# Altium PCB TB Motor driver pcb.PcbDoc
Units mm, origin at the board's own origin, x right, y up, seen from the top; angles counter-clockwise.
Board outline 108 x 90 mm, 2 copper layers (Top Layer, Bottom Layer); 29 components, 23 nets, 106 pads, 141 vias.
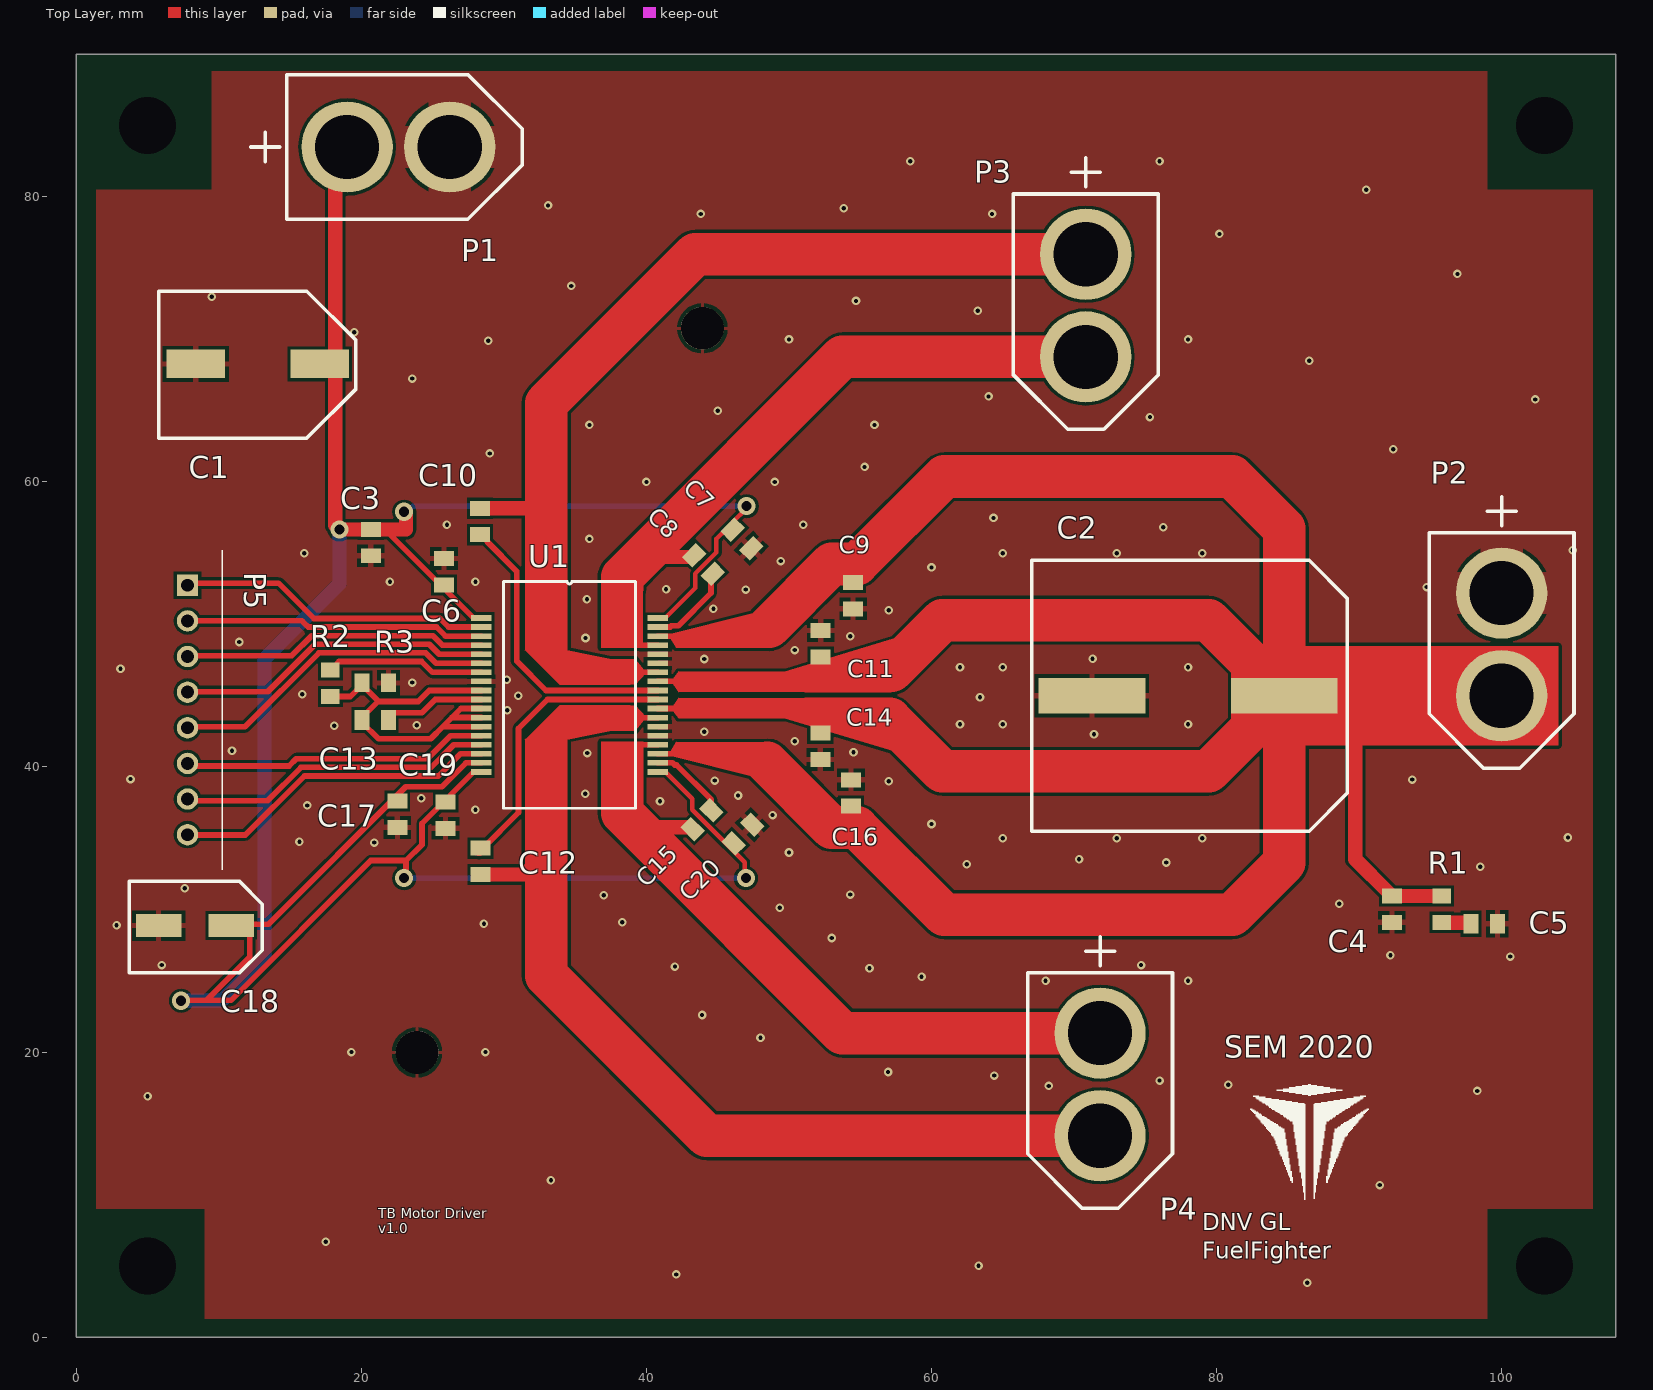
[diagram p0: Top Layer view]
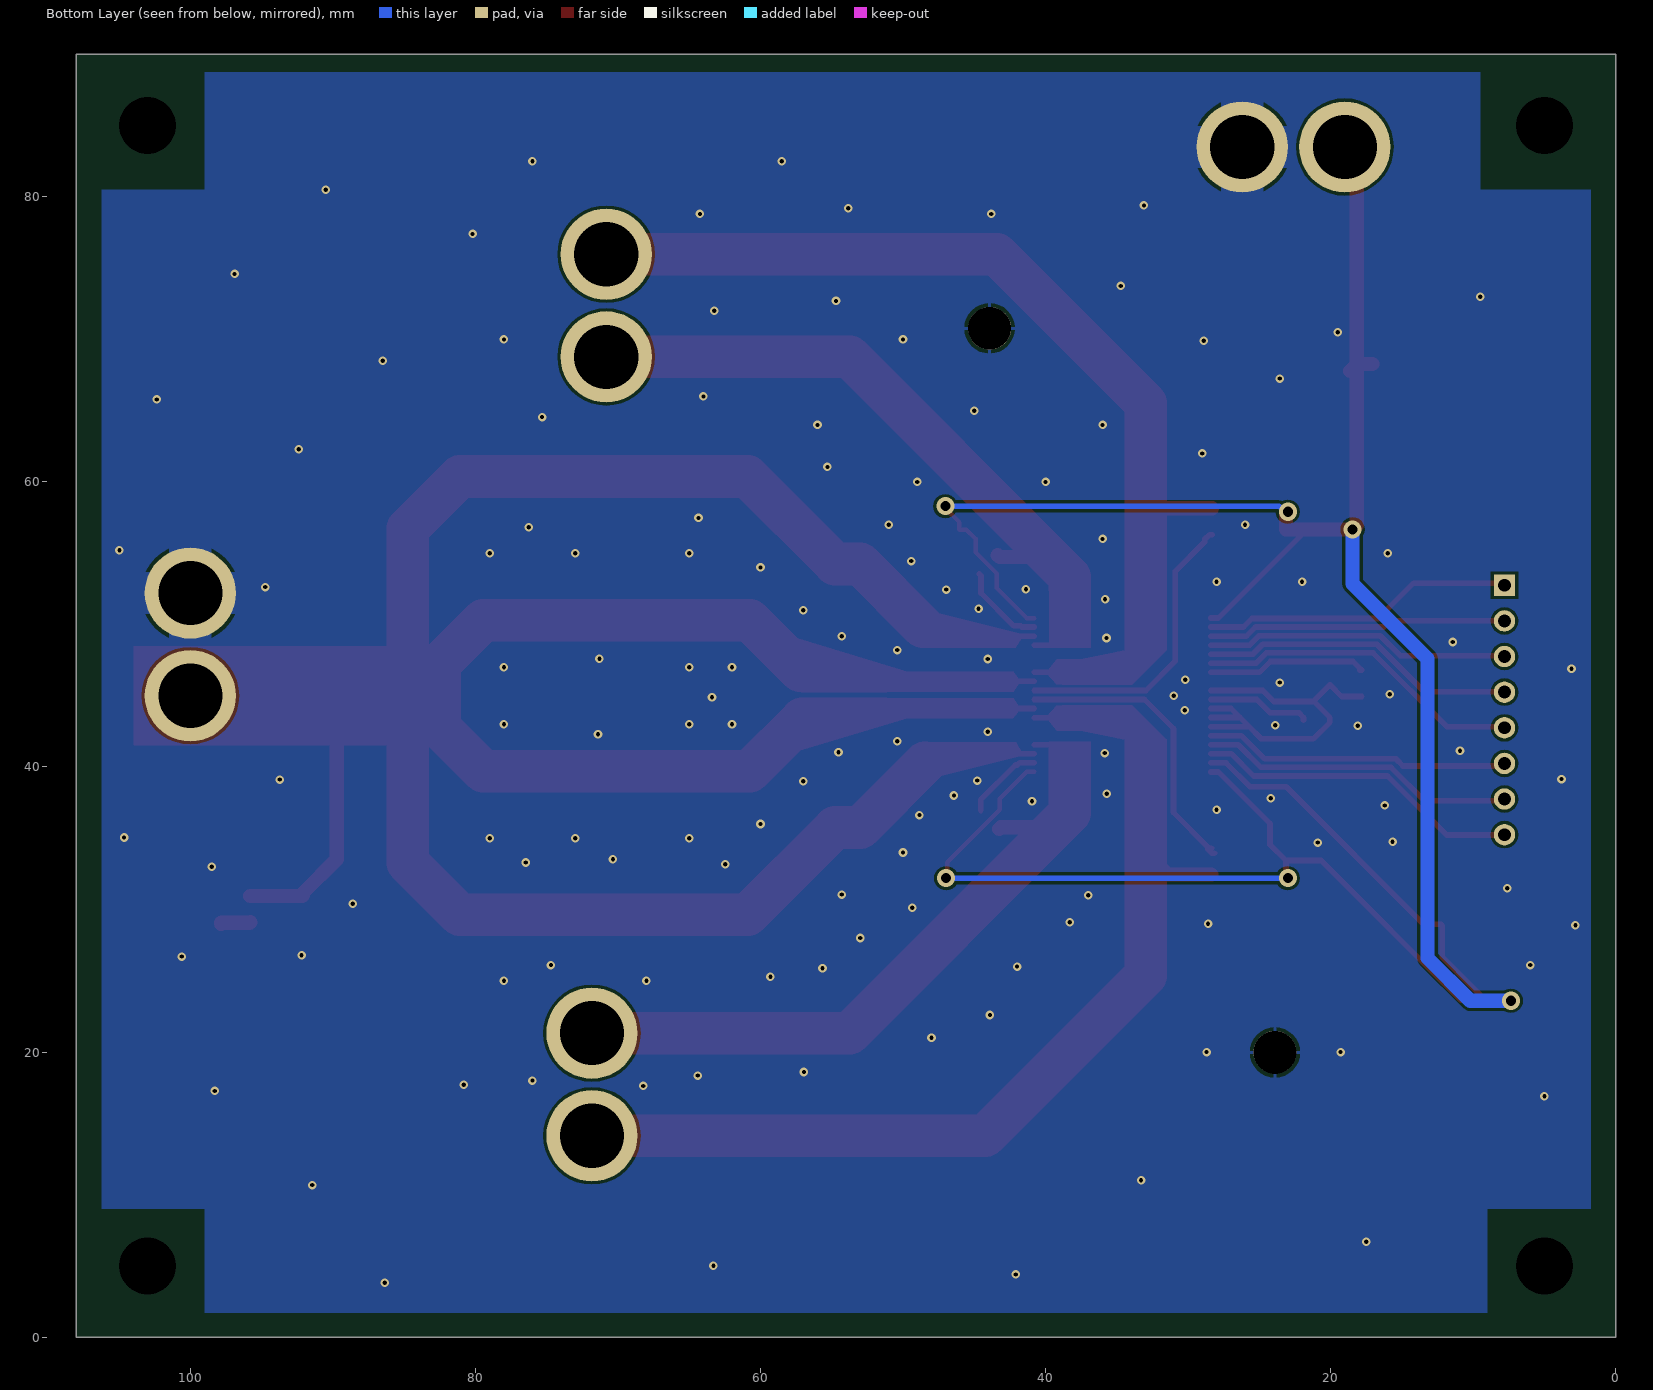
[diagram p1: Bottom Layer view, seen from below]
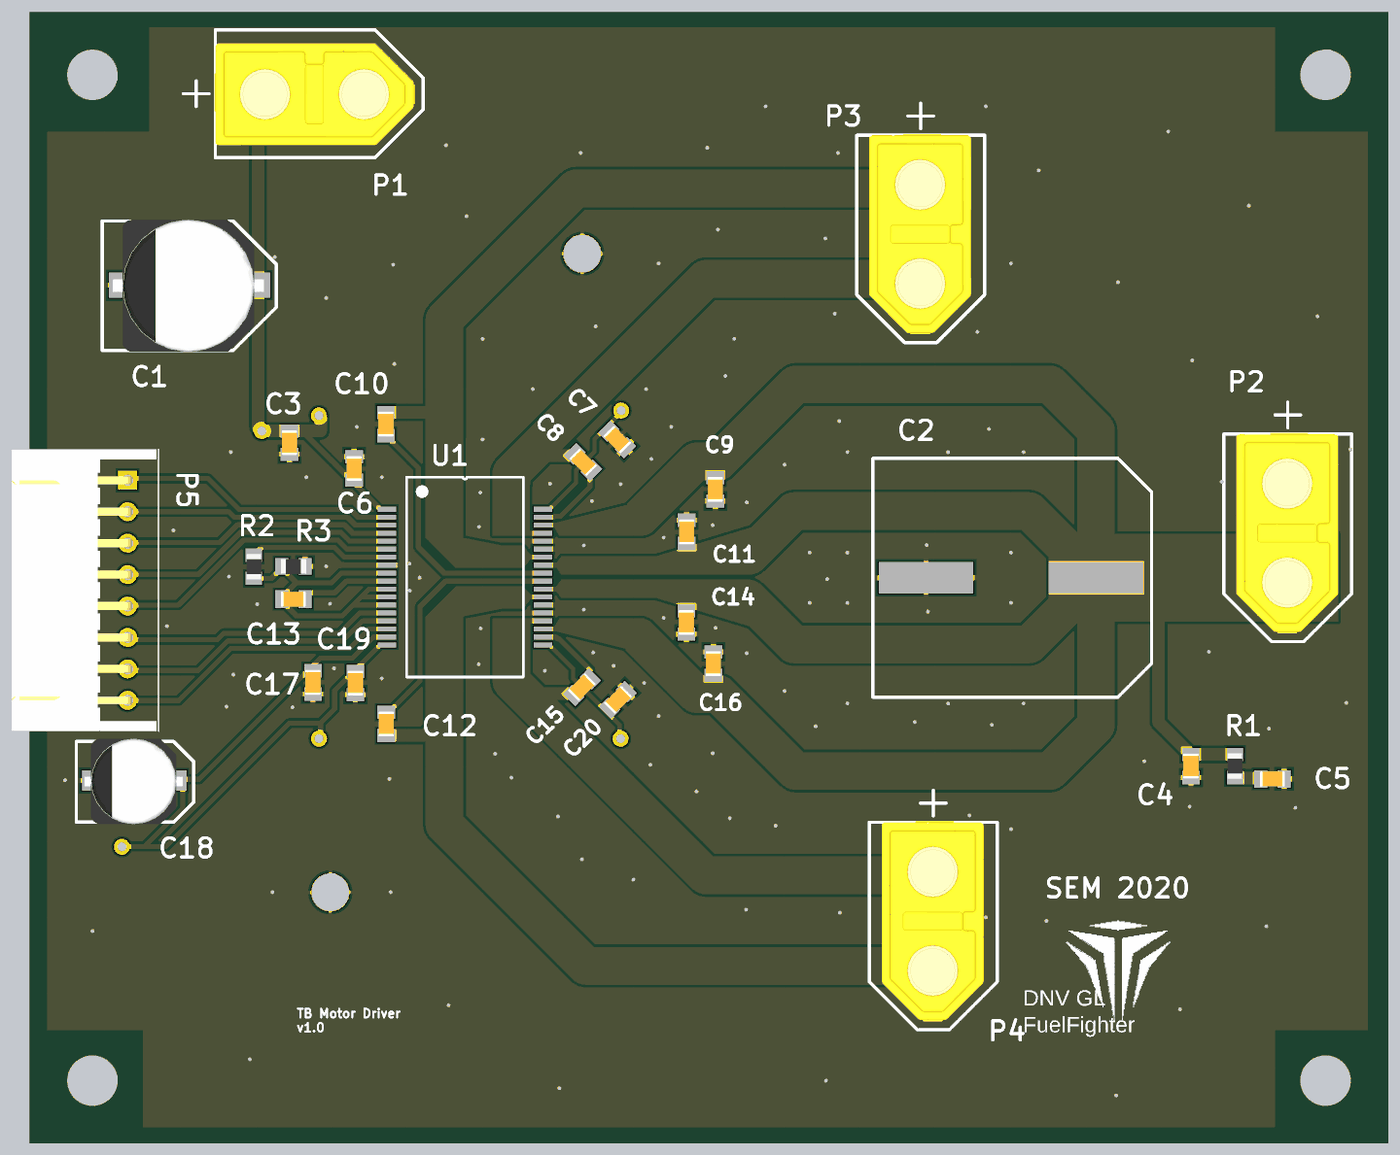
[diagram p2: 3D render of the assembled board from above, using the file's embedded part models]

## Layer stack, top to bottom
Top Solder: solder mask 0.0102, Solder Resist, Dk 3.5
Top Layer: signal copper 0.0356
Dielectric 1: dielectric 0.32, FR-4, Dk 4.8
Bottom Layer: signal copper 0.0356
Bottom Solder: solder mask 0.0102, Solder Resist, Dk 3.5

## Board outline
0,90 108,90 108,0 0,0

## Design rules (kind name [scope] priority, off if disabled: settings)
Clearance [All] p1: gap=0.203 ignorepadtopadclearanceinfootprint=TRUE
HoleSize [All] p1: absolutevalues=TRUE maxlimit=5 minlimit=0.025 maxpercent=80.000 minpercent=20.000
PlaneConnect [All] p1: planeconnectstyle=Relief reliefexpansion=0.508 reliefentries=4 reliefconductorwidth=0.4 reliefairgap=0.254
PolygonConnect [HasFootprint('XT-60')] p1: connectstyle=Relief reliefconductorwidth=3 reliefentries=4 polygonreliefangle="90 Angle" airgapwidth=0.254
PolygonConnect PolygonConnect_1 [All] p2: thpad.connectstyle=Relief thpad.reliefconductorwidth=0.254 thpad.reliefentries=4 thpad.polygonreliefangle="90 Angle" thpad.airgapwidth=0.254 smdpad.connectstyle=Relief smdpad.reliefconductorwidth=0.4 smdpad.reliefentries=4 smdpad.polygonreliefangle="90 Angle" smdpad.airgapwidth=0.254 via.connectstyle=Direct via.reliefconductorwidth=3 via.reliefentries=4 via.polygonreliefangle="90 Angle" via.airgapwidth=0.254
RoomDefinition "TB Motor driver pcb" [InComponentClass('TB Motor driver pcb')] p1: confinementstyle=ConfineIn formatcopy=TRUE lockcomponents=FALSE outline -1.9,-2.2 111,-2.2 111,91 -1.9,91
RoutingVias [All] p1: holewidth=0.3 width=0.6 viastyle="Through Hole" minholewidth=0.3 minwidth=0.6 maxholewidth=0.711 maxwidth=1.27
SilkToSilkClearance [All] p1: silktosilkclearance=0.1
SilkToSolderMaskClearance SilkToSolderMaskClearance_1 [IsPad] p1: minsilkscreentomaskgap=0.254 clearancetoexposedcopper=TRUE
SilkToSolderMaskClearance [IsPad] p2: minsilkscreentomaskgap=0.204 clearancetoexposedcopper=TRUE
SolderMaskExpansion [All] p1: expansion=0.102 istentingtop=FALSE
Width [All] p1: maxlimit=4 minlimit=0.203 preferedwidth=0.254 minimp=50.000000 maximp=50.000000 favimp=50.000000
26 further rules are at their usual default settings.

## Components (designator, comment, footprint, x,y, rotation, side; value= is the part's Value field where it differs from the comment)
C1 "C_EL_SMT_Ø10" C_EL_SMT_Ø10 17.075,68.275 r0 top
C2 "C_EL_SMT_Ø18" C_EL_SMT_Ø18 78,45 r0 top value="1000 uF/63V"
C3 "SMD" C_SMD_0805_pcb 20.66,55.745 r270 top value="0.1 uF/16V"
C4 "SMD" C_SMD_0805_pcb 92.3,30.025 r90 top value="0.1 uF/100V"
C5 "SMD" C_SMD_0805_pcb 98.775,29 r0 top value="0.01 uF/100V"
C6 "SMD" C_SMD_0805_pcb 25.8,53.7 r270 top value="1 uF/16V"
C7 "SMD" C_SMD_0805_pcb 46.7,56 r135 top value="1 uF/16V"
C8 "SMD" C_SMD_0805_pcb 44,54.2 r315 top value="0.1 uF/100V"
C9 "SMD" C_SMD_0805_pcb 54.5,52.025 r90 top value="0.1 uF/100V"
C10 "SMD" C_SMD_0805_pcb 28.325,57.225 r270 top value="0.1 uF/100V"
C11 "SMD" C_SMD_0805_pcb 52.225,48.65 r270 top value="0.1 uF/100V"
C12 "SMD" C_SMD_0805_pcb 28.35,33.375 r90 top value="0.1 uF/100V"
C13 "SMD" C_SMD_0805_pcb 20.975,43.3 r180 top value="0.1 uF/10V"
C14 "SMD" C_SMD_0805_pcb 52.2,41.45 r90 top value="0.1 uF/100V"
C15 "SMD" C_SMD_0805_pcb 43.9,36.3 r45 top value="0.1 uF/100V"
C16 "SMD" C_SMD_0805_pcb 54.35,38.175 r270 top value="0.1 uF/100V"
C17 "SMD" C_SMD_0805_pcb 22.525,36.675 r270 top value="0.1 uF/16V"
C18 "C_EL_SMT_Ø6.3" C_EL_SMT_Ø6.3 10.875,28.875 r0 top value="47 uF/16V"
C19 "SMD" C_SMD_0805_pcb 25.9,36.625 r270 top value="1 uF/16V"
C20 "SMD" C_SMD_0805_pcb 46.775,35.3 r45 top value="1 uF/16V"
P1 "XT-60" XT-60 26.2,83.5 r90 top
P2 "XT-60" XT-60 100,45 r0 top
P3 "XT-60" XT-60 70.825,68.775 r0 top
P4 "XT-60" XT-60 71.825,14.125 r0 top
P5 "JST_SE_8PIN" JST_SE_8PIN 7.8,52.75 r270 top
R1 "SMD" R_SMD_0805_pcb 95.8,30.025 r90 top value="3.3 Ohm 1/4W"
R2 "SMD" R_SMD_0805_pcb 17.825,45.875 r90 top value="27 kOhm"
R3 "SMD" R_SMD_0805_pcb 20.975,45.9 r0 top value="1 Ohm 1/4W"
U1 "Motor driver" DRV8432DKDR-SOP36 28.4,50.45 r0 top

## Footprints (in the part's own frame and the unit in brackets; to place one, negate y for a bottom-side part, rotate by r counter-clockwise, add the part's x,y. Pads: shape width x height; smd on the part's side, far side on the other; paste and mask are expansions set on the pad)
C_EL_SMT_Ø6.3 [mm]
  rect 3.2x1.6 smd: 1(-5.1,0) 2(0,0)
  silkscreen extent -7.16,-3.3 2.17,3.1, body extent -6.5,-3.47 1.3,3.33, height 5.5
C_EL_SMT_Ø10 [mm]
  rect 4.1x2 smd: 1(-8.7,0) 2(0,0)
  silkscreen extent -11.3,-5.2 2.54,5.1, body extent -10.45,-5.3 1.55,5.2, height 10.5
C_EL_SMT_Ø18 [mm]
  rect 7.5x2.5 smd: 1(-6.75,0) 2(6.75,0)
  silkscreen extent -10.97,-9.5 11.17,9.5, body extent -9,-9 9,9, height 22.6
C_SMD_0805_pcb [mm] "Chip Capacitor, 2-Leads, Body 2,00x1,25mm, IPC Medium Density"
  rect 1.05x1.4 smd: 1(-0.925,0) 2(0.925,0)
  body extent -1,-0.63 1,0.62, height 1.35
DRV8432DKDR-SOP36 [mm]
  rect 1.45x0.4 smd: 1(0,0) 2(0,-0.635) 3(0,-1.27) 4(0,-1.905) 5(0,-2.54) 6(0,-3.175) 7(0,-3.81) 8(0,-4.445) 9(0,-5.08) 10(0,-5.715) 11(0,-6.35) 12(0,-6.985) 13(0,-7.62) 14(0,-8.255) 15(0,-8.89) 16(0,-9.525) 17(0,-10.16) 18(0,-10.795) 19(12.4,-10.795) 20(12.4,-10.16) 21(12.4,-9.525) 22(12.4,-8.89) 23(12.4,-8.255) 24(12.4,-7.62) 25(12.4,-6.985) 26(12.4,-6.35) 27(12.4,-5.715) 28(12.4,-5.08) 29(12.4,-4.445) 30(12.4,-3.81) 31(12.4,-3.175) 32(12.4,-2.54) 33(12.4,-1.905) 34(12.4,-1.27) 35(12.4,-0.635) 36(12.4,0)
  round 1 on Top Overlay: ""(2.8,1.4)
  round 1 on Mech13: ""(2.8,1.4)
  silkscreen extent 1.56,-13.35 10.84,2.55, body extent 1.7,-13.3 10.8,2.4, height 2.6
JST_SE_8PIN [mm]
  rect 1.5x1.5 hole 0.9: 1(0,0)
  round 1.5 hole 0.9: 2(2.5,0) 3(5,0) 4(7.5,0) 5(10,0) 6(12.5,0) 7(15,0) 8(17.5,0)
  silkscreen extent -2.45,2.45 19.95,2.45, body extent -2.45,-9.2 19.95,2.3, height 8.1
R_SMD_0805_pcb [mm]
  rect 1.05x1.3 smd: 1(-0.925,0) 2(0.925,0)
  body extent -1,-0.6 1,0.6, height 0.65
XT-60 [mm]
  round 6.4 hole 4.5: 1(0,7.2) 2(0,0)
  silkscreen extent -5.08,-5.08 5.08,13.97, body extent -4.11,-4.41 4.02,11.52, height 15.5

## Part data
C3 C4 C5 C6 C7 C8 C9 C10 C11 C12 C13 C14 C15 C16 C17 C19 C20: library part C_SMD_0805
R1 R2 R3: library part R_SMD_0805
U1: library part DRV8432DKDR, "IC BRIDGE DRIVER PAR 36HSSOP", Manufacturer 1="Texas Instruments", Max Operating Temperature=85°C, Max Output Current=12A, Max Supply Voltage=52.5V, Min Operating Temperature=-40°C, Min Supply Voltage=0uV, Nominal Supply Current=10.5mA, Operating Supply Voltage=50V, Output Current=7A, Package Quantity=500, Power Dissipation=5W, Supplier Part Number 1=296-29573-1-ND, Category="Integrated Circuits (ICs)", ComponentLink1Description=https://datasheet.ciiva.com/15109/getdatasheetpartid-482142-15109561.pdf?src-supplier=Verical, ComponentLink1URL=https://datasheet.ciiva.com/15109/getdatasheetpartid-482142-15109561.pdf?src-supplier=Verical, ComponentLink2Description=https://datasheet.ciiva.com/1959/drv8432-1959978.pdf?src-supplier=Digi-Key, ComponentLink2URL=https://datasheet.ciiva.com/1959/drv8432-1959978.pdf?src-supplier=Digi-Key, ComponentLink3Description=https://datasheet.ciiva.com/41457/001013555-da-01-en-ic-bridge-driver-drv8432dkdr-ssop-36-tid-41457289.pdf?src-supplier=Conrad, ComponentLink3URL=https://datasheet.ciiva.com/41457/001013555-da-01-en-ic-bridge-driver-drv8432dkdr-ssop-36-tid-41457289.pdf?src-supplier=Conrad, ComponentLink4Description=https://datasheet.ciiva.com/3228/drv8432-3228999.pdf?src-supplier=Avnet, ComponentLink4URL=https://datasheet.ciiva.com/3228/drv8432-3228999.pdf?src-supplier=Avnet, ComponentLink5Description=https://datasheet.ciiva.com/1959/drv8432-1959979.pdf?src-supplier=Digi-Key, ComponentLink5URL=https://datasheet.ciiva.com/1959/drv8432-1959979.pdf?src-supplier=Digi-Key, ComponentLink6Description=https://datasheet.ciiva.com/1959/drv8432-1959980.pdf?src-supplier=Digi-Key, ComponentLink6URL=https://datasheet.ciiva.com/1959/drv8432-1959980.pdf?src-supplier=Digi-Key, Fault Protection="Over Temperature,Short Circuit", Interface=PWM, Lead Free="Lead Free", Manufacturer Part Number 1=DRV8432DKDR, Mount="Surface Mount", Number of Outputs=2, Number of Pins=36, Output Current per Channel=7A, Packaging="Tape and Reel", Pricing 1="1=11,86000, 10=10,71800, 25=10,21960, 100=8,47480, 250=7,72708 (USD)", Radiation Hardening=No, RoHS=Yes, Stock 1=2413, Supplier 1=Digi-Key
C2: Category=Capacitors
P5: Category="Pin Header"

## Free pads (board coordinates)
  round 0 hole 4: ""(5,5) ""(5,85) ""(103,5) ""(103,85)
  round 3 hole 3: ""(23.905,19.975) ""(43.925,70.775)

## Via types
v1: diameter 0.6, hole 0.3, Top Layer to Bottom Layer, tented both sides, 135 vias
v2: diameter 1.27, hole 0.711, Top Layer to Bottom Layer, 6 vias

## Nets (pads, with @x,y where several pads share a name; then routed paths per layer and width w, separated by ;. In a path a pad name is that pad's centre, name@x,y a point inside that pad or via, vN(x,y) a via of type N, cw(c..) or ccw(c..) an arc to the next point about the centre after c; other vN are vias at no path point)
+12V: C1.2 C3.1 C6.2 C7.2 C17.1 C18.2 C19.1 C20.1 P1.1 U1.1 U1.17 U1.18 U1.19 U1.36 | length 210.4
  Top Layer w0.32: U1.19 41.325,39.655 43.2,37.78 43.2,37.006 46.891,33.315 46.891,32.284 v2(46.975,32.2) ; U1.36 41.325,50.45 43.435,52.56 43.425,52.57 43.425,53.573 44.9,55.048 44.9,56 45.554,56.654 C7.2 46.046,57.184 47.025,58.163 v2(47.025,58.3)
  Top Layer w0.4: v2(7.35,23.6) 7.375,23.625 9.113,23.625 ; 21.898,56.67 21.898,56.428 27.875,50.45 U1.1 ; v2(23,32.2) 23.135,32.335 23.135,33.435 ; v2(23,57.905) v2@23.135,57.77 ; U1.18 27.875,39.655 24.25,36.03 24.25,34.55 23.135,33.435 ; U1.17 27.336,40.29 25.654,38.608 23.114,38.608 13.475,28.969 12.269,28.969 12.175,28.875 12.175,26.687 9.113,23.625 ; 9.113,23.625 10.85,23.625 20.66,33.435 23.135,33.435
  Top Layer w1: C1.2 18.125,68.275 C1.2@18.625,67.775 ; P1.1 18.162,82.662 18.162,56.968 v2(18.46,56.67) 21.898,56.67 23.135,56.67 v2@23.135,57.77
  Bottom Layer w0.4: v2(23,32.2) v2(46.975,32.2) ; v2(23,57.905) 23.235,57.905 23.63,58.3 v2(47.025,58.3)
  Bottom Layer w1: v2(7.35,23.6) 10.2,23.6 13.2,26.6 13.2,47.6 18.46,52.86 v2(18.46,56.67)
+36V: C2.2 C4.2 C9.2 C11.2 C14.2 C16.2 P2.2 R1.2 U1.21 U1.26 U1.29 U1.34 | length 194.9
  Top Layer w0.4: U1.21 41.979,40.925 ; U1.26 41.725,44.1 42.593,44.1 ; U1.29 41.732,46.005 42.6,46.005 ; U1.34 41.979,49.18
  Top Layer w1: 89.675,45 89.725,44.95 89.725,33.525 92.1,31.15 92.1,30.975 92.125,30.95 C4.2 R1.2
  Top Layer w3: 48.478,40.278 53.006,35.75 54.775,35.75 60.9,29.625 81.1,29.625 84.75,33.275 C2.2 ; 48.603,49.847 53.006,54.25 54.775,54.25 60.9,60.375 81.1,60.375 84.75,56.725 C2.2 ; 57.088,43.363 60.75,39.7 79.45,39.7 C2.2 ; 57.2,46.75 60.75,50.3 79.45,50.3 C2.2
AGND: C13.2 R2.1 R3.1 U1.9 U1.11 U1.12 U1.13 | length 28.1
  Top Layer w0.4: R2.1 19.225,44.95 20.05,45.775 21.175,44.65 21.175,44.6 ; U1.13 25.725,42.83 ; U1.12 26.36,43.465 ; U1.11 26.995,44.1 26.36,43.465 ; U1.9 24.758,45.37 23.988,44.6 21.175,44.6 ; 21.175,44.6 20.05,43.475 20.05,43.125 21.2,41.975 24.87,41.975 25.725,42.83 ; 25.725,42.83 26.36,43.465
BST_A: C8.2 U1.35 | length 6.1
  Top Layer w0.4: U1.35 41.66,49.815 41.744,49.899 42.226,49.899 44.53,52.203 44.53,53.422 C8.2
BST_B: C10.2 U1.28 | length 20.8
  Top Layer w0.4: C10.2 28.5,56.3 28.825,55.975 28.825,55.8 30.9,53.725 30.9,47.425 32.955,45.37 U1.28
BST_C: C12.2 U1.27 | length 20.8
  Top Layer w0.4: C12.2@28.15,33.95 28.325,33.95 C12.2@28.6,34.225 ; C12.2 28.525,34.3 31.025,36.8 31.025,42.7 33.06,44.735 U1.27
BST_D: C15.2 U1.20 | length 5.6
  Top Layer w0.4: U1.20 41.83,40.29 41.982,40.137 42.113,40.137 44.554,37.696 C15.2
C5: C5.1 R1.1 | length 2.1
  Top Layer w1: R1.1 95.825,29.075 97.825,29.075 97.85,29.05 C5.1
FAULT: P5.2 U1.3 | length 21.1
  Top Layer w0.4: P5.2@7.875,50.005 8.12,50.25 15.834,50.25 16.268,49.816 25.264,49.816 25.899,49.18 U1.3
GND: C1.1 C2.1 C3.2 C4.1 C5.2 C6.1 C7.1 C9.1 C11.1 C14.1 C16.1 C17.2 C18.1 C19.2 C20.2 P1.2 P2.1 pad.@23.905,19.975 pad.@43.925,70.775 R3.2 U1.8 U1.23 U1.24 U1.31 U1.32
  other v1: 86.36,3.81 42.1,4.4 63.3,5 17.5,6.7 91.44,10.668 33.3,11 5,16.9 98.298,17.272 68.225,17.625 80.81,17.7 76,18 64.4,18.35 56.95,18.6 19.3,20 28.7,20 48,21 43.9,22.6 68,25 78,25 59.3,25.275 55.65,25.875 42,26 6,26.1 74.7,26.1 100.6,26.7 92.2,26.8 53,28 2.825,28.9 28.6,29 38.3,29.1 49.35,30.125 88.6,30.4 37,31 54.3,31.05 7.6,31.5 98.5,33 62.475,33.175 76.475,33.3 70.35,33.525 50,34 20.9,34.7 15.65,34.75 65,35 73,35 79,35 104.648,35.052 60,36 48.85,36.625 28,37 16.2,37.3 40.95,37.6 24.2,37.8 46.425,38 35.7,38.125 57,39 44.8,39.05 93.726,39.116 3.8,39.15 35.85,40.975 54.525,41.025 10.922,41.148 50.4,41.8 71.4,42.3 44.05,42.475 18.1,42.9 23.876,42.926 62,43 65,43 78,43 30.225,43.975 63.4,44.9 31,45 15.85,45.1 23.568,45.92 30.2,46.125 3.1,46.9 62,47 65,47 78,47 44.05,47.575 71.3,47.6 50.4,48.2 11.43,48.768 35.725,49.05 54.3,49.175 57,51 44.7,51.1 35.825,51.775 46.975,52.45 41.375,52.475 94.75,52.625 22,53 28,53 60,54 49.425,54.45 16,55 65,55 73,55 79,55 104.975,55.2 36,56 76.25,56.825 26,57 51,57 64.35,57.475 40,60 49,60 55.3,61.05 29,62 92.4,62.292 36,64 56,64 75.325,64.55 45,65 102.362,65.786 64,66 23.575,67.25 86.5,68.5 28.9,69.9 50,70 78,70 19.5,70.5 63.25,72 54.7,72.7 9.5,73 34.725,73.75 96.9,74.592 80.2,77.4 43.8,78.8 64.25,78.8 53.85,79.2 33.1,79.4 90.5,80.5 58.5,82.5 76,82.5
OC_ADJ: R2.2 U1.7 | length 11.3
  Top Layer w0.4: R2.2@17.95,46.8 R2.2 18.428,47.403 24.225,47.403 24.988,46.64 U1.7
OTW: P5.1 U1.2 | length 21.9
  Top Layer w0.4: P5.1@7.875,52.545 8.23,52.9 14.183,52.9 16.664,50.419 25.513,50.419 26.117,49.815 U1.2
OUT_A: C8.1 P3.2 U1.33 | length 44.7
  Top Layer w0.4: 39.51,48.545 U1.33
  Top Layer w1: 39.7,54.73 43.222,54.73 C8.1
  Top Layer w3: 38.3,52.575 38.3,53.33 39.7,54.73 53.745,68.775 P3.2
OUT_B: C10.1 P3.1 U1.30 | length 59.3
  Top Layer w0.4: 39.198,46.675 39.233,46.675 39.268,46.64 U1.30
  Top Layer w1: C10.1 32.73,58.15 32.975,57.905 ; 32.063,56.993 32.975,56.08
  Top Layer w3: 32.975,56.08 32.975,57.905 32.975,65.525 43.425,75.975 P3.1
OUT_C: C12.1 P4.2 U1.25 | length 59.1
  Top Layer w0.4: 39.268,43.465 U1.25
  Top Layer w1: C12.1 31.4,32.45 32.975,34.025 ; 32.85,32.325 32.975,32.2
  Top Layer w3: 32.975,34.025 32.975,32.2 32.975,25.375 44.225,14.125 P4.2
OUT_D: C15.1 P4.1 U1.22 | length 48.3
  Top Layer w0.4: 39.51,41.56 U1.22
  Top Layer w1: 39.305,35.77 43.122,35.77 C15.1
  Top Layer w3: 38.3,39.9 38.3,36.775 39.305,35.77 53.75,21.325 P4.1
PWM_A: P5.3 U1.4 | length 21.5
  Top Layer w0.4: P5.3@7.875,47.465 8.21,47.8 15.106,47.8 16.518,49.212 25.014,49.212 25.681,48.545 U1.4
PWM_B: P5.5 U1.6 | length 23.2
  Top Layer w0.4: P5.5@7.875,42.385 8.315,42.825 11.837,42.825 17.018,48.006 24.514,48.006 25.245,47.275 U1.6
PWM_C: P5.6 U1.14 | length 21.5
  Top Layer w0.4: P5.6@7.875,39.845 8.105,40.075 14.929,40.075 15.43,40.576 24.642,40.576 26.261,42.195 U1.14
PWM_D: P5.8 U1.16 | length 23.1
  Top Layer w0.4: P5.8@7.875,34.765 8.335,35.225 11.857,35.225 16.002,39.37 25.4,39.37 26.955,40.925 U1.16
RESET_AB: P5.4 U1.5 | length 22.3
  Top Layer w0.4: P5.4@7.875,44.925 8.225,45.275 13.434,45.275 16.768,48.609 24.764,48.609 25.463,47.91 U1.5
RESET_CD: P5.7 U1.15 | length 22.3
  Top Layer w0.4: P5.7@7.875,37.305 8.195,37.625 13.404,37.625 15.752,39.973 24.892,39.973 26.479,41.56 U1.15
VREG: C13.1 U1.10 | length 7.2
  Top Layer w0.4: C13.1 21.9,43.475 22.225,43.8 24.242,43.8 25.177,44.735 U1.10
pads on no net: U1.

## Polygon pours and split planes (outlines as drawn)
GND on Bottom Layer "Bottom Layer-GND" (solid, pour order 38): 1.75,9 9,9 9,1.725 99,1.725 99,9 106.225,9 106.225,80.5 99,80.5 99,88.75 9.5,88.75 9.5,80.5 1.75,80.5
GND on Top Layer "Top Layer-GND" (solid, pour order 40): 1.4,9 9,9 9,1.275 99,1.275 99,9 106.375,9 106.375,80.5 99,80.5 99,88.8 9.5,88.8 9.5,80.5 1.4,80.5

## Other copper
Top Layer:
  rectangle net +36V: 81,41.5 104,48.5
  rectangle net OUT_C: 31.475,33.83 34.475,41.93
  rectangle net OUT_C: 33.975,42.53 39.233,44.33
  rectangle net OUT_B: 33.975,45.775 39.233,47.575
  rectangle net OUT_B: 31.475,48.175 34.475,56.275
  rectangle net +36V: 42.243,43.405 51.093,44.855
  rectangle net +36V: 42.25,45.25 51.1,46.7
  rectangle net +36V: 42.1,40.73 48.85,41.755
  rectangle net +36V: 42.1,48.35 48.85,49.375
  rectangle net OUT_A: 36.8,48.35 39.75,53.575
  rectangle net OUT_D: 36.8,39.9 39.8,41.775
  region net OUT_C: 39.223,44.33 39.223,42.53 39.977,43.48
  region net OUT_C: 32.325,41.505 38.27,42.672 34.5,43.48 31.475,41.93
  region net OUT_C: 31.487,41.918 33.899,44.33 38.875,44.33
  region net OUT_B: 39.223,45.775 39.223,47.575 39.977,46.625
  region net OUT_B: 31.475,48.175
  region net OUT_B: 32.325,48.6 38.27,47.433 34.5,46.625 31.475,48.175
  region net OUT_B: 31.487,48.187 33.899,45.775 38.875,45.775
  region net +36V: 42.252,43.405 42.252,44.855 41.725,44.1
  region net +36V: 57.168,42.305 57.724,40.982 49.669,43.431 51.093,44.855
  region net +36V: 51.093,44.855 57.168,44.855 57.168,42.305
  region net +36V: 42.259,46.7 42.259,45.25 41.732,46.005
  region net +36V: 57.175,47.8 57.731,49.123 49.676,46.674 51.1,45.25
  region net +36V: 51.1,45.25 57.175,45.25 57.175,47.8
  region net +36V: 42.1,41.755 42.325,40.955 41.7,41.105
  region net +36V: 41.672,40.779 47.385,40.858 47.678,40.472 47.678,39.271
  region net +36V: 42.1,48.35 42.325,49.15 41.7,49
  region net +36V: 41.47,49.292 47.183,49.213 47.475,49.599 47.475,50.8

## Silkscreen, mask and mechanical layers (free items; w line width, h text height)
Top Overlay:
  drawing of 5 lines, arcs and shapes, not listed
  text "SEM 2020" at 80.522,19.596 h1.52
  text "TB Motor Driver / v1.0" at 21.2,7.3 h0.7
  text "DNV GL / FuelFighter" at 78.998,5.118 h2
Mechanical 1:
  lines w0.254: 0.229,89.725 27.165,89.725 81.038,89.725 107.75,89.725 ; 0.254,89.725 0.254,0.254 107.75,0.254 107.75,89.75